# EAGLE board PCB_2D (EAGLE 9.7.0)
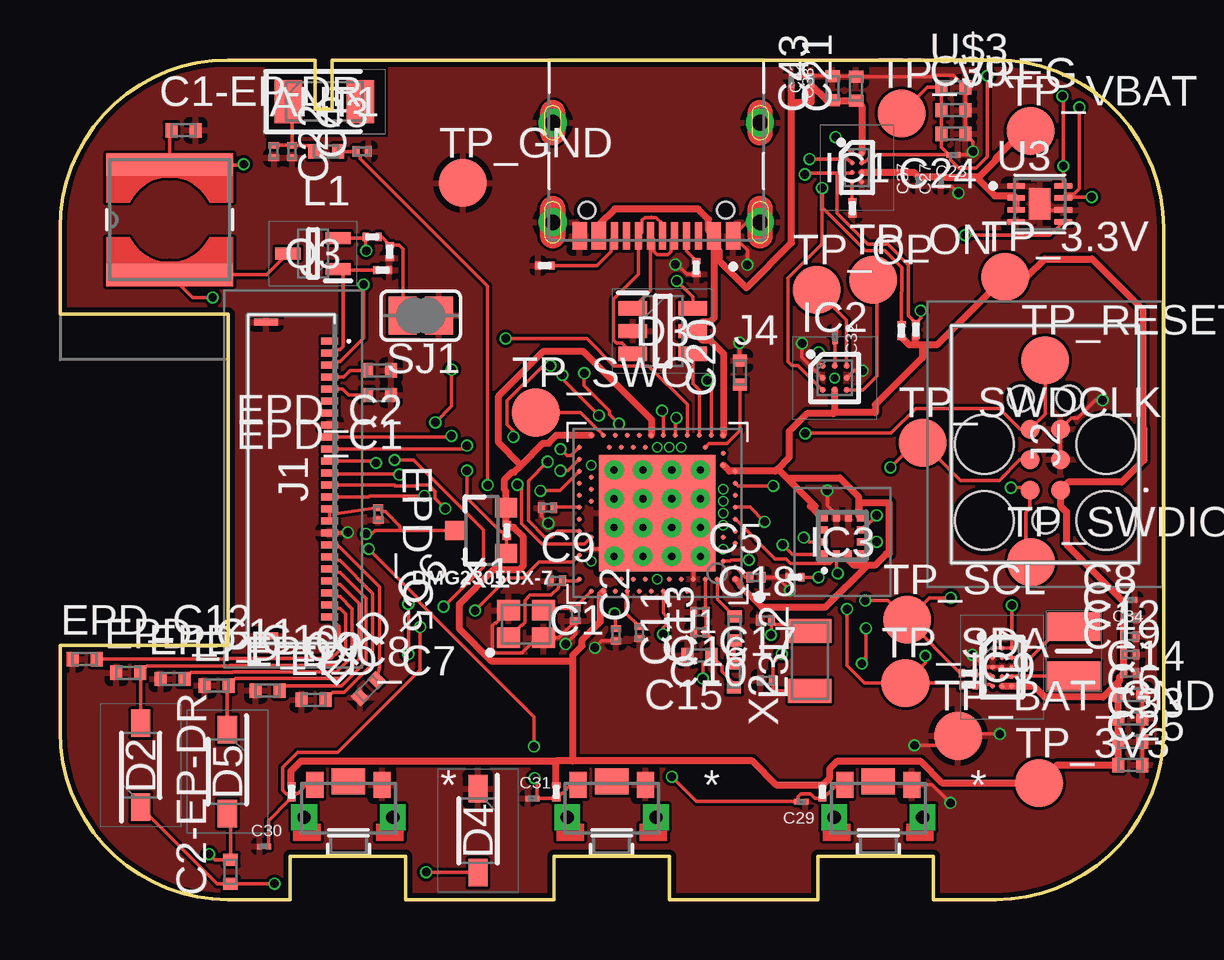
[diagram p0: board, top side]
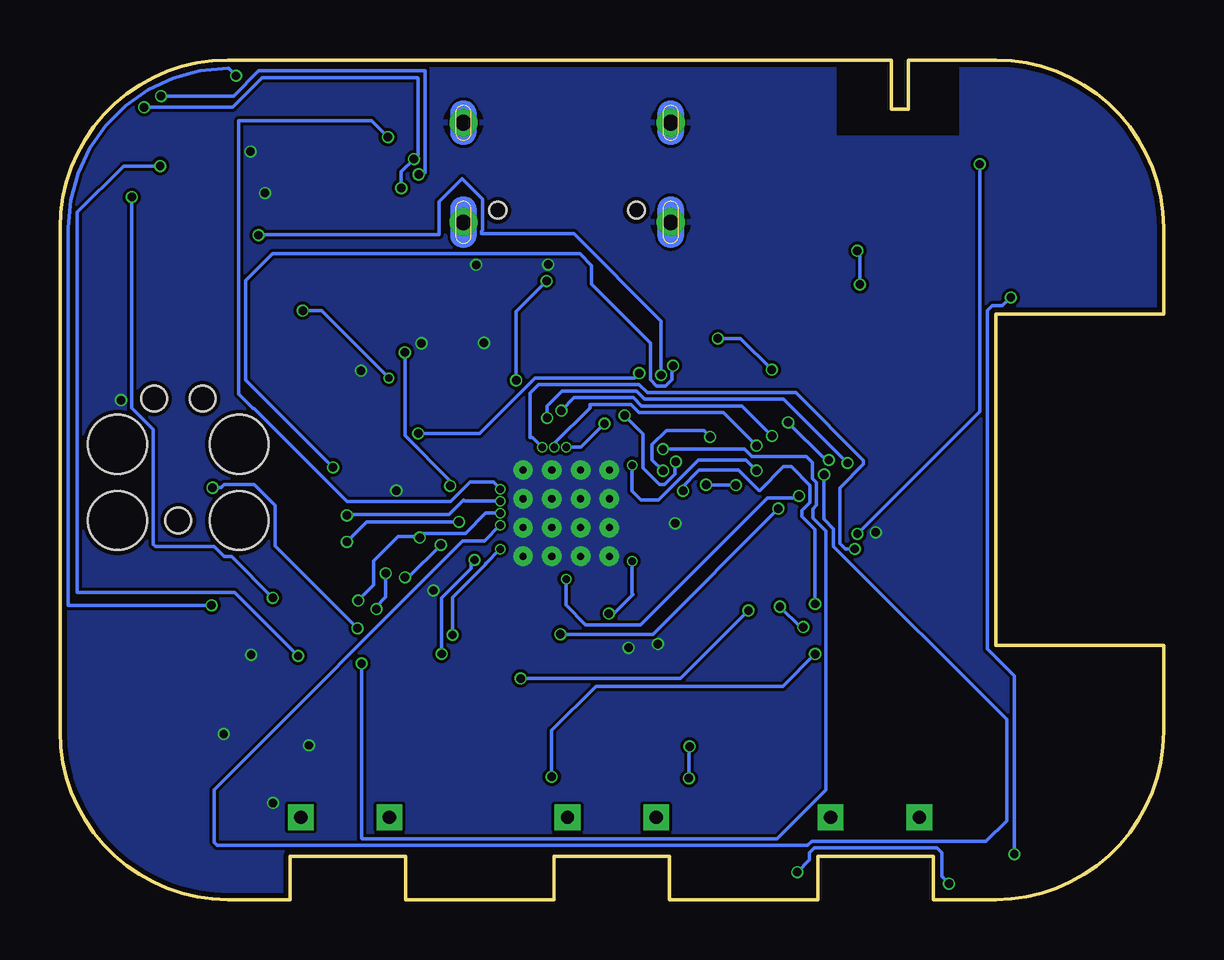
[diagram p1: board, bottom side, seen from below]

Size 46 x 35 mm. Coordinates in mm from the lower left corner, seen from the top.
Outline: 39,0 36.4,0 36.4,1.8 31.6,1.8 31.6,0 25.4,0 25.4,1.8 20.6,1.8 20.6,0 14.4,0 14.4,1.8 9.6,1.8 9.6,0 7,0 arc-90 0,7 0,10.6 7,10.6 7,24.4 0,24.4 0,28 arc-90 7,35 10.64,35 10.64,32.95 11.34,32.95 11.34,35 39,35 arc-90 46,28 46,7 arc-90 39,0
Copper layers (1*16): Top 0.035mm / dielectric 1.6mm / Bottom 0.035mm
Design rules "jlcpcb-2layers.dru": minimum track width 5mil, minimum drill 0.3mm, track to track 5mil, track to pad 5mil, pad to pad 5mil, via to via 5mil, smd to smd 5mil, copper to edge 0.2mm, drill to drill 6mil, minimum pad ring 10mil, minimum via ring 3mil, stop-mask expansion 4mil, vias tented up to drill 0mil, thermal gap 10mil

## Footprints (pad centres in the part's own frame; a part is rotated, then mirrored left to right if it is on the bottom)
2450AT18B100E_ANTC3216X140N = smd 1.15 x 1.8: 1 -1.5,0; 2 1.5,0
NORDIC_NRF_3_RESC0201_L = smd 0.28 x 0.43: 1 -0.255,0; 2 0.255,0
NORDIC_NRF_3_RESC0402_L = smd 0.5 x 0.6: 1 -0.5,0; 2 0.5,0
GRM011R60J152KE01L_2_CAPC0201X13N = smd 0.22 x 0.23: 1 -0.185,0; 2 0.185,0
ESP32_C6_LIBRARY_5_SOD3716X135N = smd 1.15 x 0.8: 1 -1.75,0; 2 1.75,0
ESP32_C6_LIBRARY_3_SOT95P280X145-6N = smd 1.2 x 0.6: 1 -1.25,0.95; 2 -1.25,0; 3 -1.25,-0.95; 4 1.25,-0.95; 5 1.25,0; 6 1.25,0.95
ESP32_C6_LIBRARY_4_ESP32_C6_LIBRARY_4_ESP32_C6_LIBRARY_4_ESP32_C6_LIBRARY_4_ESP32_WROVER_SPARKFUN-DISCRETESEMI_SOT23-3 = smd 0.8 x 0.9: 1 -0.95,-1; 2 0.95,-1; 3 0,1.1
BQ25180YBGR_BGA8C40P2X4_100X155X50 = smd 0.2 x 0.2: A1 -0.2,0.6; A2 0.2,0.6; B1 -0.2,0.2; B2 0.2,0.2; C1 -0.2,-0.2; C2 0.2,-0.2; D1 -0.2,-0.6; D2 0.2,-0.6
DRV2605YZFR_BGA9C50P3X3_144X144X62 = smd 0.25 x 0.25: A1 -0.5,0.5; A2 0,0.5; A3 0.5,0.5; B1 -0.5,0; B2 0,0; B3 0.5,0; C1 -0.5,-0.5; C2 0,-0.5; C3 0.5,-0.5
BMA423_BMA423 = smd 0.3 x 0.35: 1 -0.75,-0.775; 2 -0.25,-0.775; 3 0.25,-0.775; 4 0.75,-0.775; 7 0.75,0.775; 8 0.25,0.775; 9 -0.25,0.775; 10 -0.75,0.775 | smd 0.35 x 0.3: 5 0.775,-0.25; 6 0.775,0.25; 11 -0.775,0.25; 12 -0.775,-0.25
RT6160AWSC_BGA15C40P3X5_140X230X60 = smd 0.216 x 0.216: A1 -0.4,0.8; A2 0,0.8; A3 0.4,0.8; B1 -0.4,0.4; B2 0,0.4; B3 0.4,0.4; C1 -0.4,0; C2 0,0; C3 0.4,0; D1 -0.4,-0.4; D2 0,-0.4; D3 0.4,-0.4; E1 -0.4,-0.8; E2 0,-0.8; E3 0.4,-0.8
503480-2400_5034802400 = smd 0.3 x 0.7: 1 -5.75,1.525; 2 -5.25,1.525; 3 -4.75,1.525; 4 -4.25,1.525; 5 -3.75,1.525; 6 -3.25,1.525; 7 -2.75,1.525; 8 -2.25,1.525; 9 -1.75,1.525; 10 -1.25,1.525; 11 -0.75,1.525; 12 -0.25,1.525; 13 0.25,1.525; 14 0.75,1.525; 15 1.25,1.525; 16 1.75,1.525; 17 2.25,1.525; 18 2.75,1.525; 19 3.25,1.525; 20 3.75,1.525; 21 4.25,1.525; 22 4.75,1.525; 23 5.25,1.525; 24 5.75,1.525 | smd 0.3 x 1: MP1 -6.54,-1.125; MP2 6.54,-1.125
TC2030-IDC_TC2030IDC = smd 0.783 x 0.783: 1 -0.953,-0.635; 2 -0.953,0.635; 3 0.317,-0.635; 4 0.317,0.635; 5 1.588,-0.635; 6 1.588,0.635 | hole 2.451: -2.223,-2.54; -2.223,2.54; 0.952,-2.54; 0.952,2.54 | hole 1.067: -2.223,0; 2.857,-1.016; 2.857,1.016
KH-TYPE-C-16P_KINGHELM_KH-TYPE-C-16P = smd 0.6 x 1.15: A1_B12 -3.2,4.725; A4_B9 -2.4,4.725; A9_B4 2.4,4.725; A12_B1 3.2,4.725 | smd 0.3 x 1.15: A5 -1.25,4.725; A6 -0.25,4.725; A7 0.25,4.725; A8 1.25,4.725; B5 1.75,4.725; B6 0.75,4.725; B7 -0.75,4.725; B8 -1.75,4.725 | drill 0.65 pad 1.05: SH1 -4.32,0; SH2 4.32,0; SH3 -4.32,4.15; SH4 4.32,4.15 | hole 0.7: -2.89,3.65; 2.89,3.65
NORDIC_NRF_2_RESC0402_L = smd 0.5 x 0.6: 1 -0.5,0; 2 0.5,0
ESP32_C6_LIBRARY_2_IND_4828-WE-TPC_WRE = smd 0.9 x 5.3: 1 -2.286,0; 2 2.286,0
MLP2016SR47MT0S1_INDC2016X100N = smd 1.2 x 2.2: 1 -1.028,0; 2 1.028,0
ESP32_C6_LIBRARY_6_SOT65P210X110-3N = smd 1.05 x 0.5: 1 -1.05,0.65; 2 -1.05,-0.65; 3 1.05,0
ERA-1AEB3401C_0201 = smd 0.35 x 0.25: 1 0,0.275; 2 0,-0.275
CPF0201D7K68C1_0201 = smd 0.35 x 0.25: 1 0,0.275; 2 0,-0.275
ESP32_C6_LIBRARY_7_JUMPER_SJ = smd 1.168 x 1.6: 1 -0.762,0; 2 0.762,0
2025-10-22_07-23-44_LIBRARY_SW_EVP-AKE31A_PAN = smd 0.711 x 1.092: 1 -1.4,-0.972; 2 1.4,-0.972 | drill 0.559 pad 0.914 square: 3 -1.848,0.381; 4 1.848,0.381 | smd 1.397 x 1.092: 5 0,-1.124
HECTOR_WATCH_1_TP20R = smd 2 x 2: TP 0,0
NORDIC_NRF_4_AQFN50P700X700X85_HS-74N = smd 4.85 x 4.85: P$74 0,0 | drill 0.3 pad 0.6: P$75 -1.8,1.8; P$76 -0.6,1.8; P$77 0.6,1.8; P$78 1.8,1.8; P$79 -1.8,0.6; P$80 -0.6,0.6; P$81 0.6,0.6; P$82 1.8,0.6; P$83 -1.8,-0.6; P$84 -0.6,-0.6; P$85 0.6,-0.6; P$86 1.8,-0.6; P$87 -1.8,-1.8; P$88 -0.6,-1.8; P$89 0.6,-1.8; P$90 1.8,-1.8 | smd 0.2 x 0.2: P$A8 -1.25,3.25; P$A10 -0.75,3.25; P$A12 -0.25,3.25; P$A14 0.25,3.25; P$A16 0.75,3.25; P$A18 1.25,3.25; P$A20 1.75,3.25; P$A22 2.25,3.25; P$A23 2.75,3.25; P$AA24 3.25,-2.25; P$AB2 -2.75,-2.5; P$AC5 -2,-2.75; P$AC9 -1,-2.75; P$AC11 -0.5,-2.75; P$AC13 0,-2.75; P$AC15 0.5,-2.75; P$AC17 1,-2.75; P$AC19 1.5,-2.75; P$AC21 2,-2.75; P$AC24 3.25,-2.75; P$AD2 -2.75,-3.25; P$AD4 -2.25,-3.25; P$AD6 -1.75,-3.25; P$AD8 -1.25,-3.25; P$AD10 -0.75,-3.25; P$AD12 -0.25,-3.25; P$AD14 0.25,-3.25; P$AD16 0.75,-3.25; P$AD18 1.25,-3.25; P$AD20 1.75,-3.25; P$AD22 2.25,-3.25; P$AD23 2.75,-3.25; P$B1 -3.25,2.75; P$B3 -2.5,2.75; P$B5 -2,2.75; P$B7 -1.5,2.75; P$B9 -1,2.75; P$B11 -0.5,2.75; P$B13 0,2.75; P$B15 0.5,2.75; P$B17 1,2.75; P$B19 1.5,2.75; P$B24 3.25,2.75; P$C1 -3.25,2.25; P$D2 -2.75,2; P$D23 2.75,2; P$E24 3.25,1.75; P$F2 -2.75,1.5; P$F23 2.75,1.5; P$G1 -3.25,1.25; P$H2 -2.75,1; P$H23 2.75,1; P$J1 -3.25,0.75; P$J24 3.25,0.75; P$K2 -2.75,0.5; P$L1 -3.25,0.25; P$L24 3.25,0.25; P$M2 -2.75,0; P$N1 -3.25,-0.25; P$N24 3.25,-0.25; P$P2 -2.75,-0.5; P$P23 2.75,-0.5; P$R1 -3.25,-0.75; P$R24 3.25,-0.75; P$T2 -2.75,-1; P$T23 2.75,-1; P$U1 -3.25,-1.25; P$U24 3.25,-1.25; P$V23 2.75,-1.5; P$W1 -3.25,-1.75; P$W24 3.25,-1.75; P$Y2 -2.75,-2; P$Y23 2.75,-2
ESP32_C6_LIBRARY_SON50P200X200X80-9N = smd 0.76 x 0.27: 1 -0.985,0.75; 2 -0.985,0.25; 3 -0.985,-0.25; 4 -0.985,-0.75; 5 0.985,-0.75; 6 0.985,-0.25; 7 0.985,0.25; 8 0.985,0.75 | smd 0.9 x 1.3: 9 0,0
NORDIC_NRF_BT-XTAL_2016_N = smd 0.95 x 0.85: 1 -0.725,-0.575; 2 0.725,-0.575; 3 0.725,0.575; 4 -0.725,0.575
NORDIC_NRF_1_XTAL_3215_N = smd 1 x 1.8: 1 -1.25,0; 2 1.25,0

## Placement (x,y rotation side)
ANT1  2450AT18B100E  [2450AT18B100E_ANTC3216X140N]  11.02,33.26 0 top
C1  12pF  [NORDIC_NRF_3_RESC0201_L]  20.69,13.29 180 top
C1-EP-DR  10uF  [NORDIC_NRF_3_RESC0402_L]  5.15,32.06 0 top
C2  12pF  [NORDIC_NRF_3_RESC0201_L]  21.48,11.88 270 top
C2-EP-DR  4.7uF/25V  [NORDIC_NRF_3_RESC0402_L]  7.11,1.16 90 top
C3  1pF  [NORDIC_NRF_3_RESC0201_L]  12.6,31.18 0 top
C4  1pF  [NORDIC_NRF_3_RESC0201_L]  9.68,31.18 270 top
C5  100nF  [NORDIC_NRF_3_RESC0201_L]  29.02,13.43 0 top
C6  4.7uF  [NORDIC_NRF_3_RESC0402_L]  44.61,7.56 0 top
C7  100nF  [NORDIC_NRF_3_RESC0201_L]  44.6,10.96 0 top
C8  100nF  [NORDIC_NRF_3_RESC0201_L]  44.61,11.74 0 top
C9  820pF  [NORDIC_NRF_3_RESC0201_L]  20.33,16.33 180 top
C10  N.C.  [NORDIC_NRF_3_RESC0201_L]  26.67,11.15 180 top
C11  100pF  [NORDIC_NRF_3_RESC0201_L]  23.18,11.03 270 top
C12  100nF  [NORDIC_NRF_3_RESC0201_L]  44.6,10.22 0 top
C13  N.C.  [NORDIC_NRF_3_RESC0201_L]  24.16,11.13 270 top
C14  4.7uF  [NORDIC_NRF_3_RESC0402_L]  44.61,8.54 0 top
C15  1.0uF  [NORDIC_NRF_3_RESC0402_L]  26.65,10.18 180 top
C16  47nF  [NORDIC_NRF_3_RESC0201_L]  26.67,11.99 180 top
C17  12pF  [NORDIC_NRF_3_RESC0201_L]  29.44,9.13 0 top
C18  12pF  [NORDIC_NRF_3_RESC0201_L]  29.4,11.64 0 top
C19  100nF  [NORDIC_NRF_3_RESC0201_L]  44.6,9.45 0 top
C20  4.7uF  [NORDIC_NRF_3_RESC0402_L]  28.34,21.96 90 top
C21  4.7uF  [NORDIC_NRF_3_RESC0402_L]  33.19,33.81 90 top
C22  N.C.  [NORDIC_NRF_3_RESC0201_L]  8.92,31.19 270 top
C23  0.1uF  [GRM011R60J152KE01L_2_CAPC0201X13N]  37.24,31.04 180 top
C24  10uF  [NORDIC_NRF_3_RESC0402_L]  37.24,31.92 180 top
C25  22uF  [NORDIC_NRF_3_RESC0402_L]  44.6,5.61 0 top
C27  0.1uF  [GRM011R60J152KE01L_2_CAPC0201X13N]  36.72,29.93 90 top
C29  1uF  [GRM011R60J152KE01L_2_CAPC0201X13N]  30.89,4.09 180 top
C30  1uF  [GRM011R60J152KE01L_2_CAPC0201X13N]  8.5,2.22 0 top
C31  1uF  [GRM011R60J152KE01L_2_CAPC0201X13N]  19.69,4.21 0 top
C32  1uF  [GRM011R60J152KE01L_2_CAPC0201X13N]  32.31,23.46 270 top
C33  22uF  [NORDIC_NRF_3_RESC0402_L]  44.61,6.58 0 top
C34  0.1uF  [GRM011R60J152KE01L_2_CAPC0201X13N]  44.62,12.5 180 top
C37  1uF  [GRM011R60J152KE01L_2_CAPC0201X13N]  35.78,29.94 90 top
C38  1uF  [GRM011R60J152KE01L_2_CAPC0201X13N]  30.49,34.14 270 top
C39  10uF  [NORDIC_NRF_3_RESC0402_L]  37.25,32.91 0 top
C42  0.1uF  [GRM011R60J152KE01L_2_CAPC0201X13N]  31.31,34.15 90 top
C43  4.7uF  [NORDIC_NRF_3_RESC0402_L]  32.2,33.82 90 top
D2  MBR0530  [ESP32_C6_LIBRARY_5_SOD3716X135N]  3.37,5.6 90 top
D3  USBLC6-2SC6Y  [ESP32_C6_LIBRARY_3_SOT95P280X145-6N]  25.13,23.7 0 top
D4  MBR0530  [ESP32_C6_LIBRARY_5_SOD3716X135N]  17.42,2.87 270 top
D5  MBR0530  [ESP32_C6_LIBRARY_5_SOD3716X135N]  6.98,5.33 270 top
DMG2305UX-7  20V/4.2A/52mΩ/1.4W  [ESP32_C6_LIBRARY_4_ESP32_C6_LIBRARY_4_ESP32_C6_LIBRARY_4_ESP32_C6_LIBRARY_4_ESP32_WROVER_SPARKFUN-DISCRETESEMI_SOT23-3]  17.59,15.38 90 top
EPD_C1  1uF/50V  [NORDIC_NRF_3_RESC0402_L]  13.3,21.03 180 top
EPD_C2  1uF/50V  [NORDIC_NRF_3_RESC0402_L]  13.3,22.06 180 top
EPD_C5  0.1uF/50V  [NORDIC_NRF_3_RESC0201_L]  13.26,16.08 270.4 top
EPD_C6  1uF/50V  [NORDIC_NRF_3_RESC0402_L]  12.85,8.79 45.4 top
EPD_C7  1uF/50V  [NORDIC_NRF_3_RESC0402_L]  10.57,8.33 0 top
EPD_C8  1uF/50V  [NORDIC_NRF_3_RESC0402_L]  8.67,8.71 0 top
EPD_C9  1uF/50V  [NORDIC_NRF_3_RESC0402_L]  6.53,8.92 0 top
EPD_C10  1uF/50  [NORDIC_NRF_3_RESC0402_L]  4.7,9.2 0 top
EPD_C11  1uF/50V  [NORDIC_NRF_3_RESC0402_L]  2.85,9.45 0 top
EPD_C12  1uF/50V  [NORDIC_NRF_3_RESC0402_L]  1.03,10.02 0 top
IC1  BQ25180YBGR  [BQ25180YBGR_BGA8C40P2X4_100X155X50]  33.22,30.51 0 top
IC2  DRV2605YZFR  [DRV2605YZFR_BGA9C50P3X3_144X144X62]  32.29,21.74 0 top
IC3  BMA423  [BMA423_BMA423]  32.61,15.16 0 top
IC9  IRT6160AWSC  [RT6160AWSC_BGA15C40P3X5_140X230X60]  39.28,9.69 0 top
J1  503480-2400  [503480-2400_5034802400]  9.72,17.53 270 top
J2  TC2030-IDC  [TC2030-IDC_TC2030IDC]  41.07,18.02 90 top
J4  KH-TYPE-C-16P  [KH-TYPE-C-16P_KINGHELM_KH-TYPE-C-16P]  24.86,32.38 180 top
L1  3.9nH  [NORDIC_NRF_2_RESC0402_L]  11.1,31.19 180 top
L2  10uH  [NORDIC_NRF_2_RESC0402_L]  28.12,11.29 270 top
L3  15nH  [NORDIC_NRF_2_RESC0402_L]  28.09,9.33 270 top
L5  68uH  [ESP32_C6_LIBRARY_2_IND_4828-WE-TPC_WRE]  4.57,28.34 90 top
L7  FTC252012SR47MBCA  [MLP2016SR47MT0S1_INDC2016X100N]  42.27,10.35 270 top
Q3  SI1308EDL-T1-GE3  [ESP32_C6_LIBRARY_6_SOT65P210X110-3N]  10.55,26.93 180 top
R1_EP_DR  0.47  [ERA-1AEB3401C_0201]  13.02,27.63 270 top
R1_USB  5K1  [ERA-1AEB3401C_0201]  26.53,26.34 180 top
R2  0  [ERA-1AEB3401C_0201]  37.89,8.93 90 top
R2_EP_DR  10K  [ERA-1AEB3401C_0201]  13.45,26.24 270 top
R2_USB  5K1  [ERA-1AEB3401C_0201]  20.21,26.43 270 top
R3  0  [CPF0201D7K68C1_0201]  30.63,13.44 90 top
R4  0  [ERA-1AEB3401C_0201]  37.86,9.43 90 top
R5  10K  [ERA-1AEB3401C_0201]  9.66,4.49 180 top
R7  10k  [ERA-1AEB3401C_0201]  31.78,4.49 180 top
R8  10K  [ERA-1AEB3401C_0201]  20.68,4.49 180 top
R9  10K  [ERA-1AEB3401C_0201]  33.03,28.83 180 top
R17  3K3  [CPF0201D7K68C1_0201]  35.08,23.72 180 top
R18  3K3  [CPF0201D7K68C1_0201]  35.68,23.76 180 top
R_PWR_EPD  10K  [ERA-1AEB3401C_0201]  18.62,15.39 180 top
R_TYPE_SEL  2.2  [ERA-1AEB3401C_0201]  13.74,27 180 top
SJ1  [ESP32_C6_LIBRARY_7_JUMPER_SJ]  15.04,24.34 180 top
SW_DN  2025-10-22_07-23-44_LIBRARY_EVP-AKE31ASW_EVP-AKE31A_PAN  [2025-10-22_07-23-44_LIBRARY_SW_EVP-AKE31A_PAN]  34.11,3.81 180 top
SW_ENT  2025-10-22_07-23-44_LIBRARY_EVP-AKE31ASW_EVP-AKE31A_PAN  [2025-10-22_07-23-44_LIBRARY_SW_EVP-AKE31A_PAN]  23,3.81 180 top
SW_UP  2025-10-22_07-23-44_LIBRARY_EVP-AKE31ASW_EVP-AKE31A_PAN  [2025-10-22_07-23-44_LIBRARY_SW_EVP-AKE31A_PAN]  12.02,3.81 180 top
TP_3.3V  HECTOR_WATCH_1_TPTP20R  [HECTOR_WATCH_1_TP20R]  39.4,25.97 0 top
TP_3V3  HECTOR_WATCH_1_TPTP20R  [HECTOR_WATCH_1_TP20R]  40.82,4.85 0 top
TP_BAT_GND  HECTOR_WATCH_1_TPTP20R  [HECTOR_WATCH_1_TP20R]  37.43,6.82 0 top
TP_GND  HECTOR_WATCH_1_TPTP20R  [HECTOR_WATCH_1_TP20R]  16.8,29.87 0 top
TP_ON  HECTOR_WATCH_1_TPTP20R  [HECTOR_WATCH_1_TP20R]  33.9,25.84 0 top
TP_OP  HECTOR_WATCH_1_TPTP20R  [HECTOR_WATCH_1_TP20R]  31.54,25.41 0 top
TP_RESET  HECTOR_WATCH_1_TPTP20R  [HECTOR_WATCH_1_TP20R]  41.07,22.49 0 top
TP_SCL  HECTOR_WATCH_1_TPTP20R  [HECTOR_WATCH_1_TP20R]  35.31,11.66 0 top
TP_SDA  HECTOR_WATCH_1_TPTP20R  [HECTOR_WATCH_1_TP20R]  35.24,9.03 0 top
TP_SWDCLK  HECTOR_WATCH_1_TPTP20R  [HECTOR_WATCH_1_TP20R]  35.95,19.05 0 top
TP_SWDIO  HECTOR_WATCH_1_TPTP20R  [HECTOR_WATCH_1_TP20R]  40.47,14.07 0 top
TP_SWO  HECTOR_WATCH_1_TPTP20R  [HECTOR_WATCH_1_TP20R]  19.84,20.3 0 top
TP_VBAT  HECTOR_WATCH_1_TPTP20R  [HECTOR_WATCH_1_TP20R]  40.46,32.03 0 top
TP_VREG  HECTOR_WATCH_1_TPTP20R  [HECTOR_WATCH_1_TP20R]  35.08,32.78 0 top
U1  NORDIC_NRF_4_NRF52840_QF  [NORDIC_NRF_4_AQFN50P700X700X85_HS-74N]  24.9,16.11 180 top
U3  MAX17048G+T10  [ESP32_C6_LIBRARY_SON50P200X200X80-9N]  40.84,29 0 top
U$3  [NORDIC_NRF_3_RESC0402_L]  37.24,33.86 0 top
X1  32MHz  [NORDIC_NRF_BT-XTAL_2016_N]  19.43,11.49 0 top
X2  32.768kHz  [NORDIC_NRF_1_XTAL_3215_N]  31.25,9.96 90 top

## Library data of the parts
ANT1 = InkTime_v5; ARROW_PART_NUMBER: 2450AT18B100E; ARROW_PRICE-STOCK: https://www.arrow.com/en/products/2450at18b100e/johanson-dielectrics?utm_currency=USD&region=nac; DESCRIPTION: Antennas 2.45GHz ANTENNA; HEIGHT: 1.4mm; MANUFACTURER_NAME: JOHANSON TECHNOLOGY; MANUFACTURER_PART_NUMBER: 2450AT18B100E; MOUSER_PART_NUMBER: 609-2450AT18B100E; MOUSER_PRICE-STOCK: https://www.mouser.co.uk/ProductDetail/Johanson-Technology/2450AT18B100E?qs=yCnrNFeXz%252Bh5MFsFIXGZGA%3D%3D
C1 C1-EP-DR C2 C2-EP-DR C3-C22 C24 C25 C33 C39 C43 EPD_C1 EPD_C2 EPD_C5-EPD_C12 L1-L3 R1_EP_DR R1_USB R2 R2_EP_DR R2_USB R3-R5 R7-R9 R17 R18 R_PWR_EPD R_TYPE_SEL SJ1 TP_3.3V TP_3V3 TP_BAT_GND TP_GND TP_ON TP_OP TP_RESET TP_SCL TP_SDA TP_SWDCLK TP_SWDIO TP_SWO TP_VBAT TP_VREG U1 U$3 X1 X2 = InkTime_v5
C23 C27 C29-C32 C34 C37 C38 C42 = InkTime_v5; AVAILABILITY: In Stock; CHECK_PRICES: https://www.snapeda.com/parts/GRM011R60J152KE01L/Murata/view-part/?ref=eda; DESCRIPTION: SMD Capacitor X5R(EIA) with Capacitance: 1500pF Tol. 10%. Rated Voltage: 6.3Vdc; MF: Murata; MP: GRM011R60J152KE01L; PACKAGE: 0201 Murata; PRICE: None; SNAPEDA_LINK: https://www.snapeda.com/parts/GRM011R60J152KE01L/Murata/view-part/?ref=snap
D2 D4 D5 = InkTime_v5; AVAILABILITY: In Stock; CHECK_PRICES: https://www.snapeda.com/parts/MBR0530/Onsemi/view-part/?ref=eda; DESCRIPTION: Diode Schottky 30 V 500mA Surface Mount SOD-123; MF: ON Semiconductor; MP: MBR0530; PACKAGE: SOD-123-2 ON Semiconductor; PRICE: None; PURCHASE-URL: https://www.snapeda.com/api/url_track_click_mouser/?unipart_id=179458&manufacturer=ON Semiconductor&part_name=MBR0530&search_term=None; SNAPEDA_LINK: https://www.snapeda.com/parts/MBR0530/Onsemi/view-part/?ref=snap
D3 = InkTime_v5; AVAILABILITY: In Stock; CHECK_PRICES: https://www.snapeda.com/parts/USBLC6-2SC6Y/STMicroelectronics/view-part/?ref=eda; DESCRIPTION: 17V Clamp 5A (8/20µs) Ipp Tvs Diode Surface Mount SOT-23-6; MF: STMicroelectronics; MP: USBLC6-2SC6Y; PACKAGE: SOT-23-6 STMicroelectronics; PRICE: None; SNAPEDA_LINK: https://www.snapeda.com/parts/USBLC6-2SC6Y/STMicroelectronics/view-part/?ref=snap
DMG2305UX-7 = InkTime_v5; PROD_ID: TRAN-14388
IC1 = InkTime_v5; ARROW_PART_NUMBER: BQ25180YBGR; ARROW_PRICE-STOCK: https://www.arrow.com/en/products/bq25180ybgr/texas-instruments?utm_currency=USD&region=nac; DESCRIPTION: Charger IC Lithium Ion/Polymer, Lithium Iron Phosphate 8-DSBGA (1.6x1.1); HEIGHT: 0.5mm; MANUFACTURER_NAME: Texas Instruments; MANUFACTURER_PART_NUMBER: BQ25180YBGR; MOUSER_PART_NUMBER: 595-BQ25180YBGR; MOUSER_PRICE-STOCK: https://www.mouser.co.uk/ProductDetail/Texas-Instruments/BQ25180YBGR?qs=doiCPypUmgEWjAK%252BJAX6Tw%3D%3D
IC2 = InkTime_v5; ARROW_PART_NUMBER: DRV2605YZFR; ARROW_PRICE-STOCK: https://www.arrow.com/en/products/drv2605yzfr/texas-instruments?region=nac; DESCRIPTION: Haptic Driver for ERM/LRA with Built-In Library and Smart Loop Architecture; HEIGHT: 0.625mm; MANUFACTURER_NAME: Texas Instruments; MANUFACTURER_PART_NUMBER: DRV2605YZFR
IC3 = InkTime_v5; ARROW_PART_NUMBER: BMA423; ARROW_PRICE-STOCK: https://www.arrow.com/en/products/bma423/bosch; DESCRIPTION: Accelerometers Triaxial low-g 12bit Acceleration Sensor; HEIGHT: 1mm; MANUFACTURER_NAME: BOSCH; MANUFACTURER_PART_NUMBER: BMA423; MOUSER_PART_NUMBER: 262-BMA423; MOUSER_PRICE-STOCK: https://www.mouser.co.uk/ProductDetail/Bosch-Sensortec/BMA423?qs=HXFqYaX1Q2xC%252BSgeGoX3mg%3D%3D
IC9 = InkTime_v5; DESCRIPTION: Buck-Boost Regulator Positive Output Step-Up/Step-Down I2C DC-DC Controller IC 15-WL-CSP (BSC) (1.4x2.3); HEIGHT: 0.6mm; MANUFACTURER_NAME: RICHTEK; MANUFACTURER_PART_NUMBER: RT6160AWSC; MOUSER_PART_NUMBER: 835-RT6160AWSC; MOUSER_PRICE-STOCK: https://www.mouser.co.uk/ProductDetail/Richtek/RT6160AWSC?qs=amGC7iS6iy%2FLd9PSoixZXQ%3D%3D
J1 = InkTime_v5; DESCRIPTION: FFC & FPC Connectors 0.5mm FPC RA SMT Dual Contact 24Ckt; HEIGHT: 1.87mm; MANUFACTURER_NAME: Molex; MANUFACTURER_PART_NUMBER: 503480-2400; MOUSER_PART_NUMBER: 538-503480-2400; MOUSER_PRICE-STOCK: https://www.mouser.co.uk/ProductDetail/Molex/503480-2400?qs=OAhjpuo3Vu7efIoxFh9AOw%3D%3D
J2 = InkTime_v5; DESCRIPTION: CABLE ADAPTER 6 POS; HEIGHT: 19mm; MANUFACTURER_NAME: Tag Connect; MANUFACTURER_PART_NUMBER: TC2030-IDC
J4 = InkTime_v5; AVAILABILITY: Not in stock; CHECK_PRICES: https://www.snapeda.com/parts/KH-TYPE-C-16P/Kinghelm/view-part/?ref=eda; MF: kinghelm; MP: KH-TYPE-C-16P; PACKAGE: None; PRICE: None; SNAPEDA_LINK: https://www.snapeda.com/parts/KH-TYPE-C-16P/Kinghelm/view-part/?ref=snap
L5 = InkTime_v5; COPYRIGHT: Copyright (C) 2024 Ultra Librarian. All rights reserved.; MANUFACTURER_PART_NUMBER: 744043680; MFR_NAME: Wurth Electronics
L7 = InkTime_v5; DESCRIPTION: SMD / SMT Inductors (Coils), L=0.47?H, L x W x T :; HEIGHT: 1mm; JLCPCB: https://jlcpcb.com/partdetail/6763488-FTC252012SR47MBCA/C5832368; MANUFACTURER_NAME: TDK; MANUFACTURER_PART_NUMBER: FTC252012SR47MBCA
Q3 = InkTime_v5; AVAILABILITY: In Stock; CHECK_PRICES: https://www.snapeda.com/parts/SI1308EDL-T1-GE3/Vishay+Siliconix/view-part/?ref=eda; DESCRIPTION: Si1308EDL-T1-GE3 N-channel MOSFET Transistor, 1.5 A, 30 V, 3-Pin SC-70 | Siliconix / Vishay SI1308EDL-T1-GE3; MF: Vishay Siliconix; MP: SI1308EDL-T1-GE3; PACKAGE: SOT-323 Vishay Semiconductor; PRICE: None; PURCHASE-URL: https://www.snapeda.com/api/url_track_click_mouser/?unipart_id=274603&manufacturer=Vishay Siliconix&part_name=SI1308EDL-T1-GE3&search_term=None; SNAPEDA_LINK: https://www.snapeda.com/parts/SI1308EDL-T1-GE3/Vishay+Siliconix/view-part/?ref=snap
SW_DN SW_ENT SW_UP = InkTime_v5; COPYRIGHT: Copyright (C) 2025 Ultra Librarian. All rights reserved.; DIGI-KEY_PART_NUMBER_1: P123437TR-ND; DIGI-KEY_PART_NUMBER_2: P123437CT-ND; DIGI-KEY_PART_NUMBER_3: P123437DKR-ND; MANUFACTURER_NAME: Panasonic; MANUFACTURER_PART_NUMBER: EVP-AKE31A
U3 = InkTime_v5; AVAILABILITY: In Stock; CHECK_PRICES: https://www.snapeda.com/parts/MAX17048G+T10/Analog+Devices/view-part/?ref=eda; DESCRIPTION: 3µA 1-Cell/2-Cell Fuel Gauge with ModelGauge; MF: Analog Devices; MP: MAX17048G+T10; PACKAGE: TDFN-8 Maxim; PRICE: None; PURCHASE-URL: https://www.snapeda.com/api/url_track_click_mouser/?unipart_id=329239&manufacturer=Analog Devices&part_name=MAX17048G+T10&search_term=None; SNAPEDA_LINK: https://www.snapeda.com/parts/MAX17048G+T10/Analog+Devices/view-part/?ref=snap

## Nets
3V3: C6.1 C7.1 C8.1 C12.1 C14.1 C19.1 C25.1 C33.1 C34.2 DMG2305UX-7.2 IC2.C2 IC3.3 IC3.7 IC3.10 IC9.E2 IC9.E3 J2.1 R5.2 R7.2 R8.2 R17.1 R18.1 R_PWR_EPD.2 TP_3.3V.TP TP_3V3.TP U1.P$A22 U1.P$AD14 U1.P$AD23 U1.P$B1 U1.P$W1 U1.P$Y2
ALERT: U1.P$J24 U3.5
D+: D3.4 U1.P$AD6
D-: D3.6 U1.P$AD4
DEC1: C5.1 U1.P$C1
DEC3: C11.1 U1.P$D23
DEC4_6: C10.1 C15.1 C16.1 L3.2 U1.P$B5 U1.P$E24
DN: D3.1 J4.A7 J4.B7
DP: D3.3 J4.A6 J4.B6
EPD_3V3: C1-EP-DR.1 DMG2305UX-7.3 EPD_C5.1 J1.15 J1.16 L5.2
EPD_BUSY: J1.9 U1.P$AD12
EPD_CS: J1.12 U1.P$K2
EPD_DC: J1.11 U1.P$AD10
EPD_RST: J1.10 U1.P$AC11
GDR: J1.2 Q3.1 R2_EP_DR.2
GND: C1-EP-DR.2 C1.2 C2.2 C3.2 C4.2 C5.2 C6.2 C7.2 C8.2 C9.2 C10.2 C11.2 C12.2 C13.2 C14.2 C15.2 C16.2 C17.1 C18.1 C19.2 C20.2 C21.2 C22.2 C23.1 C24.1 C25.2 C27.1 C29.1 C30.1 C31.1 C32.1 C33.2 C34.1 C37.1 C38.1 C39.2 C42.2 C43.2 D3.2 D4.1 EPD_C1.1 EPD_C2.1 EPD_C5.2 EPD_C6.1 EPD_C7.1 EPD_C8.1 EPD_C9.1 EPD_C10.1 EPD_C11.1 EPD_C12.1 IC1.D2 IC2.B1 IC2.B3 IC3.8 IC3.9 IC9.B1 IC9.C1 IC9.C2 IC9.C3 J1.8 J1.17 J1.MP1 J1.MP2 J2.3 J2.5 J4.A1_B12 J4.A12_B1 J4.SH1 J4.SH2 J4.SH3 J4.SH4 R1_USB.1 R2_EP_DR.1 R2_USB.2 R3.1 R9.1 R_TYPE_SEL.1 SJ1.1 SW_DN.1 SW_ENT.1 SW_UP.1 TP_BAT_GND.TP TP_GND.TP U1.P$74 U1.P$75 U1.P$76 U1.P$77 U1.P$78 U1.P$79 U1.P$80 U1.P$81 U1.P$82 U1.P$83 U1.P$84 U1.P$85 U1.P$86 U1.P$87 U1.P$88 U1.P$89 U1.P$90 U1.P$B7 U1.P$F23 U3.1 U3.4 U3.6 U3.9 U$3.2 X1.2 X1.4
HAPTIC_EN: IC2.A1 U1.P$U1
IMU_INT1: IC3.5 U1.P$N1
IMU_INT2: IC3.6 U1.P$P2
LX1: IC9.B2 IC9.B3 L7.1
LX2: IC9.D2 IC9.D3 L7.2
MOSI: J1.14 U1.P$B13
N$1: C32.2 IC2.A2
N$2: C2-EP-DR.2 D5.2 L5.1 Q3.3
N$3: C2.1 U1.P$A23 X1.3
N$4: C1.1 U1.P$B24 X1.1
N$5: L2.2 L3.1
N$6: L2.1 U1.P$B3
N$7: IC3.1 R3.2
N$8: C3.1 L1.1 U1.P$H23
N$9: C2-EP-DR.1 D2.1 D4.2
N$10: C13.1 U1.P$A18
N$11: C9.1 U1.P$N24
N$12: C20.1 U1.P$AC5
N$13: J4.B5 R2_USB.1
N$14: J4.A5 R1_USB.2
N$15: EPD_C2.2 J1.4
N$16: IC9.D1 R4.2
N$17: IC1.D1 R9.2
N$18: EPD_C1.2 J1.5
N$19: IC9.E1 R2.2
N$20: R1_EP_DR.1 R_TYPE_SEL.2 SJ1.2
N$28: EPD_C6.2 J1.18
N$29: EPD_C7.2 J1.19
N$30: EPD_C8.2 J1.20
N$32: EPD_C10.2 J1.22
N$34: EPD_C12.2 J1.24
OUT+: IC2.A3 TP_OP.TP
OUT-: IC2.C3 TP_ON.TP
P0.00/XL1: C17.2 U1.P$D2 X2.1
P0.01/XL2: C18.2 U1.P$F2 X2.2
P0.04: U1.P$J1
P0.09: U1.P$L24
P0.13: C30.2 R5.1 SW_UP.2 U1.P$AD8
P0.14: C31.2 R8.1 SW_ENT.2 U1.P$AC9
P0.19: U1.P$AC15
P0.20: U1.P$AD16
P0.21: U1.P$AC17
P0.22: U1.P$AD18
P0.23: U1.P$AC19
P0.24: U1.P$AD20
P0.25: U1.P$AC21
P0.26: U1.P$G1
P0.27: U1.P$H2
P0.28: U1.P$B11
P0.29: U1.P$A10
P0.30: U1.P$B9
P0.31: U1.P$A8
P1.01: DMG2305UX-7.1 R_PWR_EPD.1 U1.P$Y23
P1.02: C29.2 R7.1 SW_DN.2 U1.P$W24
P1.03: U1.P$V23
P1.04: U1.P$U24
P1.05: U1.P$T23
P1.06: U1.P$R24
P1.07: U1.P$P23
P1.09: U1.P$R1
P1.10: U1.P$A20
P1.11: U1.P$B19
P1.12: U1.P$B17
P1.13: U1.P$A16
P1.14: U1.P$B15
P1.15: U1.P$A14
PMIC_INT: IC1.A1 U1.P$T2
PREVGH: D5.1 EPD_C9.2 J1.21
PREVGL: D2.2 EPD_C11.2 J1.23
RESE: J1.3 Q3.2 R1_EP_DR.2
RESET: J2.6 TP_RESET.TP U1.P$AC13
RF: ANT1.1 C4.1 C22.1 L1.2
SCK: J1.13 U1.P$A12
SCL: IC1.B1 IC2.C1 IC3.12 R4.1 R17.2 TP_SCL.TP U1.P$M2 U3.7
SDA: IC1.C1 IC2.B2 IC3.2 R2.1 R18.2 TP_SDA.TP U1.P$L1 U3.8
SWDCLK: J2.4 TP_SWDCLK.TP U1.P$AA24
SWDIO: J2.2 TP_SWDIO.TP U1.P$AC24
SWO: TP_SWO.TP U1.P$AD22
VBAT: C27.2 C37.2 IC1.C2 TP_VBAT.TP U3.2 U3.3
VBUS: C21.1 C38.2 C42.1 C43.1 D3.5 IC1.A2 J4.A4_B9 J4.A9_B4 U1.P$AD2
VREG: C23.2 C24.2 C39.1 IC1.B2 IC9.A1 IC9.A2 IC9.A3 TP_VREG.TP U$3.1

## Tracks (layer width: path | path; a pad name or v marks a point on that pad's centre or on a via)
3V3
  Top 0.3: C8.1 C7.1 C12.1 C19.1 44.17,9.27 44.17,9.13 44.11,9.07 | C8.1 | C34.2 44.35,12.41 | 44.35,12.41 C8.1 | 44.35,12.41 41.95,14.81 41.95,16.17 41.7,16.41 J2.1 42.03,17.4 44.26,17.4 45.18,18.32 45.18,19.63 45.13,19.68 45.13,24.6 43.02,26.71 41.04,26.71 40.3,25.97 TP_3.3V.TP 36.55,23.12 35.98,23.12 | U1.P$A22 22.53,12.73 22.53,11.59 21.77,10.83 21.77,10.58 21.38,10.19 21.38,9.93 | 32.29,20.32 32.32,20.3 33.99,20.3 33.99,20.63 35.95,22.59 35.95,23.09 35.98,23.12 | IC2.C2 32.29,20.32 | U1.P$Y2 27.9,17.86 U1.P$W1 29.82,17.86 29.92,17.95 | 29.92,17.95 30.3,17.58 | 30.3,17.58 31.47,16.4 31.28,16.4 31.74,15.94 IC3.10 | 33.29,16.23 33.29,16.79 32.5,17.58 30.3,17.58 | 33.29,16.23 33.29,16.01 IC3.7 | 33.29,16.23 33.33,16.18 33.33,16.54 34.57,16.54 34.57,14.41 34.45,14.41 33.97,13.93 33.65,13.93 | R8.2 20.69,5.78 | 20.69,5.78 10.05,5.78 9.63,5.36 9.63,4.79 R5.2 | IC9.E2 IC9.E3 40.61,8.89 41.05,8.44 43.48,8.44 44.11,9.07 | 32.29,20.32 32.23,20.26 31.14,20.26 30.39,19.51 30.39,18.43 29.92,17.95 | 33.65,13.93 31.9,12.19 29.25,12.19 28.34,13.1 28.34,13.16 U1.P$B1 | IC3.3 32.79,14.31 32.79,14.24 33.1,13.93 33.65,13.93 | 21.38,5.78 28.86,5.78 29.87,4.76 R7.2 32.08,5.06 32.08,5.44 32.39,5.75 35.89,5.75 36.79,4.85 TP_3V3.TP 41.57,5.61 C25.1 C33.1 C6.1 C14.1 44.11,9.07 | 21.38,5.78 20.69,5.78 | 21.38,5.78 21.38,9.93 | 35.98,23.12 35.64,23.12 | R18.1 35.64,23.44 35.64,23.12 | R17.1 35.4,23.12 35.64,23.12 | 19.22,18.1 20.14,19.03 20.37,19.03 20.7,19.36 U1.P$AD23 | U1.P$AD14 24.65,20.01 21.8,22.86 20.16,22.86 18.28,20.99 18.28,19.04 19.22,18.1 | 21.38,9.93 18,9.93 16.65,11.28 16.65,12.32 18.08,13.75 19.16,13.75 19.32,13.92 19.32,15.11 18.91,15.52 18.77,15.52 R_PWR_EPD.2 18.59,15.7 DMG2305UX-7.2 18.59,17.02 18.54,17.07 18.54,17.51 18.85,17.82 18.94,17.82 19.22,18.1
ALERT  (via drill 0.35)
  Top 0.15: U1.P$J24 20.74,15.36 20.5,15.11 20.21,15.11 19.52,15.8 19.52,17.44 v20.33,18.25 | v37.72,27.7 41.27,27.7 U3.5 | v22.46,20.18 20.94,21.7 v20.94,21.86
  Bottom 0.15: v20.33,18.25 20.36,18.22 20.36,17.73 20.8,17.3 21.01,17.3 21.69,17.98 21.69,19.4 v22.46,20.18 | v20.94,21.86 20.94,24.12 24.57,27.75 28.44,27.75 28.44,27.87 28.39,27.91 28.39,29.19 29.25,30.04 30.19,29.1 30.19,27.71 v37.72,27.71 v37.72,27.7
D+
  Top 0.15: U1.P$AD6 26.65,21.23 26.38,21.5 D3.4
D-  (via drill 0.35)
  Top 0.15: U1.P$AD4 27.15,21.48 v26.98,21.65 | v25.71,25.79 26.38,25.12 D3.6
  Bottom 0.15: v26.98,21.65 26.98,24.52 v25.71,25.79
DEC1
  Top 0.15: C5.1 28.57,13.43 U1.P$C1
DEC3  (via drill 0.3, 0.35)
  Top 0.15: C11.1 23.16,11.3 23.16,11.88 v23.12,11.92
  Bottom 0.15: v23.12,11.92 v23.12,11.93 22.9,11.93 22.11,12.71 22.15,12.76 U1.P$D23
  other vias: 22.15,14.11
DEC4_6  (via drill 0.35)
  Top 0.15: C15.1 27.15,10.92 C10.1 C16.1 26.9,12.02 U1.P$B5 | C15.1 27.59,9.74 27.59,9.5 28.09,9 L3.2 | U1.P$E24 21.37,14.07 19.98,14.07 19.3,13.4 18.66,13.4 v17.3,12.05 | v26.8,9.21 26.8,9.82 C15.1
  Bottom 0.15: v17.3,12.05 20.14,9.21 v26.8,9.21
DN
  Top 0.15: J4.B7 25.46,27.51 25.46,27 25.35,26.88 24.88,26.88 24.76,27 24.76,27.51 J4.A7 24.61,25.38 D3.1
DP
  Top 0.15: J4.A6 25.11,28.17 24.85,28.44 24.66,28.44 24.65,28.44 24.38,28.44 24.26,28.32 24.26,27.81 J4.B6 24.11,26.07 23.07,25.03 23.07,23.31 23.19,23.2 23.43,23.2 D3.3
EPD_3V3  (via drill 0.35)
  Top 0.15: J1.16 J1.15 11.45,16.07 EPD_C5.1 13.43,16.17 13.57,16.17 14.18,15.55 14.18,15.38 | C1-EP-DR.1 4.57,31.99 L5.2 7.63,30.62 v7.66,30.65 | DMG2305UX-7.3 14.18,15.38 | 14.18,15.38 13.13,15.38 12.99,15.24 v12.76,15.24
  Bottom 0.15: v7.66,30.65 7.66,20.34 v12.76,15.24
EPD_BUSY  (via drill 0.35)
  Top 0.15: J1.9 16.27,19.28 v16.32,19.33 | U1.P$AD12 25.15,20.33 v25.1,20.38
  Bottom 0.15: v25.1,20.38 24.56,20.92 22.09,20.92 21.75,20.58 17.57,20.58 v16.32,19.33
EPD_CS  (via drill 0.3, 0.35)
  Top 0.15: J1.12 11.27,17.75 14.11,17.75 v14.15,17.71
  Bottom 0.15: v14.15,17.71 14.16,17.69 14.16,15.86 13.77,15.46 13.77,14.73 6.54,7.5 6.54,3.29 7.4,2.43 14.66,2.43 14.84,2.25 39.45,2.25 39.58,2.38 39.58,4.58 29.21,14.94 28.31,14.94 U1.P$K2
  other vias: 27.65,15.61
EPD_DC  (via drill 0.35)
  Top 0.15: J1.11 13.09,18.28 v13.17,18.2 | U1.P$AD10 25.65,19.85 25.7,19.89 v25.7,20.08
  Bottom 0.15: v13.17,18.2 v13.18,18.2 15.83,20.86 21.64,20.86 21.97,21.2 25.07,21.2 25.7,20.57 v25.7,20.08
EPD_RST  (via drill 0.3, 0.35)
  Top 0.15: J1.10 16.82,18.78 v16.96,18.92
  Bottom 0.15: v16.96,18.92 18.34,20.3 21.86,20.3 22.2,20.64 23.91,20.64 23.91,20.49 25.4,19 U1.P$AC11
  other vias: 25.4,18.86
GDR
  Top 0.15: 11.8,26.24 R2_EP_DR.2 | Q3.1 11.8,26.29 11.8,26.24 | J1.2 11.39,22.93 11.68,22.93 11.8,23.05 11.8,26.24
GND  (via drill 0.35)
  Top 0.15: C34.1 44.86,12.44 | 44.86,10.97 C7.2 | C12.2 | C19.2 45.11,9.2 C14.2 C6.2 C33.2 C25.2 | J4.SH3 28.64,28.23 J4.A1_B12 28.65,27.07 v28.65,26.46 | J2.3 J2.5 42.16,20.07 42.42,20.07 43.16,20.81 v43.46,20.81 | C38.1 31.3,34.33 C42.2 32.18,34.34 C43.2 C21.2 36.35,34.31 36.4,34.36 37.23,34.36 U$3.2 37.74,32.92 C39.2 C24.1 38.05,31.6 v38.05,31.18 37.92,31.04 C23.1 | X1.4 18.18,11.54 18.14,11.54 18.02,11.42 18.02,10.4 18.14,10.29 19.26,10.29 19.89,10.91 X1.2 20.77,10.91 C2.2 21.48,11.06 v21.08,10.65 | R1_USB.1 26.14,26.06 25.73,26.47 v25.65,26.47 | C20.2 28.33,22.47 v28.33,23.21 | 31.35,22.18 IC2.B1 | 31.35,22.18 31.33,22.18 | 31.35,22.18 30.93,22.6 v30.93,23.19 | C11.2 22.58,10.78 v22.3,10.49 | IC3.9 32.21,16.09 32.21,16.2 31.98,16.43 v31.98,17.04 | C9.2 20.08,15.96 v20.35,15.68 | U1.P$F23 22.8,14.61 U1.P$78 | U1.P$B7 26.4,14.01 U1.P$75 | C27.1 37.16,29.75 v37.45,29.46 | R3.1 30.35,13.43 | C5.2 29.89,13.43 v30.43,12.89 | IC9.C2 IC9.C1 38.54,9.69 v38.03,10.2 | IC2.B3 33.1,22.05 v33.45,22.05 | v39.18,6.9 37.51,6.9 TP_BAT_GND.TP 37.04,6.43 v35.62,6.43 | SW_DN.1 36.37,4.78 v37.12,4.02 | J1.17 11.97,15.28 v12,15.31 | U3.6 41.09,28.75 U3.9 | U1.P$85 U1.P$74
  pour Top: 8.62,31.72 8.59,31.68 8.56,31.67 8.53,31.67 8.5,31.68 8.48,31.7 8.47,31.73 8.47,36.89 8.39,36.97 8.39,36.96 8.39,36.96 8.38,36.95 8.37,36.94 8.37,36.94 8.37,36.94 8.35,36.94 8.34,36.93 8.34,36.93 8.34,36.93 8.33,36.93 8.31,36.93 8.31,36.93 8.31,36.93 8.3,36.93 8.28,36.94 8.28,36.94 8.28,36.94 8.27,36.95 8.26,36.96 8.26,36.96 8.22,37 -4.8,37 -4.82,36.98 -4.82,-5.36 -3.58,-4.12 -3.55,-4.11 49.45,-4.11 49.79,-3.77 49.79,36.08 49.53,36.34 13.74,36.34 13.74,36.33 13.74,31.78 13.73,31.76 13.71,31.73 13.68,31.72
  pour Bottom: 8.44,31.86 8.44,36.87 -4.71,36.87 -4.74,36.88 -4.85,36.99 -4.85,-5.4 -3.58,-4.13 -3.55,-4.12 49.44,-4.12 49.79,-3.76 49.79,36.08 49.51,36.36 13.7,36.36 13.7,31.85 13.69,31.82 13.66,31.8 13.64,31.79 8.52,31.79 8.49,31.8 8.45,31.83
HAPTIC_EN  (via drill 0.35)
  Top 0.15: IC2.A1 31.63,22.41 v31.63,22.81 | U1.P$U1 28.26,17.25 v29.74,17.25
  Bottom 0.15: v31.63,22.81 31.63,19.33 29.74,17.45 v29.74,17.25
IMU_INT1  (via drill 0.35)
  Top 0.15: U1.P$N1 28.76,16.36 v29.37,15.74 | v34.04,14.91 IC3.5
  Bottom 0.15: v29.37,15.74 33.21,15.74 v34.04,14.91
IMU_INT2  (via drill 0.3, 0.35)
  Top 0.15: 33.41,15.41 IC3.6 33.53,15.56 33.59,15.56 34.04,16.01 v34.04,16.02
  Bottom 0.15: v34.04,16.02 33.99,16.06 29.77,16.06 29.17,16.66 29.12,16.61 U1.P$P2
  other vias: 27.65,16.61
LX1
  Top 0.15: L7.1 41.75,11.38 40.47,10.09 IC9.B3 IC9.B2
LX2
  Top 0.15: L7.2 39.71,9.32 IC9.D3 IC9.D2
MOSI  (via drill 0.3, 0.35)
  Top 0.15: J1.14 12.86,16.78 12.91,16.83 v15.19,16.83
  Bottom 0.15: v15.19,16.83 15.27,16.75 16.5,16.75 21.79,11.46 24.08,11.46 24.9,12.27 U1.P$B13
  other vias: 24.9,13.36
N$1
  Top 0.15: C32.2 32.3,22.26 IC2.A2
N$2  (via drill 0.35)
  Top 0.15: Q3.3 8.62,26.05 L5.1 5.53,25.1 v6.36,25.1 | D5.2 7.11,3.45 C2-EP-DR.2 6.44,1.66 v6.22,1.89
  Bottom 0.15: v6.36,25.1 6.71,24.75 7.15,24.75 7.35,24.54 7.35,10.46 6.22,9.32 v6.22,1.89
N$3
  Top 0.15: X1.3 20.22,12.13 C2.1 21.48,12.19 U1.P$A23
N$4
  Top 0.15: U1.P$B24 21.58,13.29 C1.1 20.78,13.12 20.78,12.99 20.48,12.69 19.59,12.69 19.38,12.47 19.38,11.55 19.26,11.43 19.22,11.43 X1.1
N$5
  Top 0.15: L3.1 28.09,10.77 L2.2
N$6
  Top 0.15: L2.1 27.4,12.52 U1.P$B3
N$7  (via drill 0.35)
  Top 0.15: IC3.1 30.53,14.39 v30.12,14.79 | v31.62,13.43 R3.2
  Bottom 0.15: v30.12,14.79 31.48,13.43 v31.62,13.43
N$8  (via drill 0.35)
  Top 0.15: v17.83,17.27 17.83,25.57 12.51,30.89 12.51,31.02 C3.1 L1.1 | U1.P$H23 21.87,14.83 20.1,14.83 19.25,15.68 19.25,17.12 v19.07,17.29
  Bottom 0.15: v17.83,17.27 19.05,17.27 v19.07,17.29
N$9  (via drill 0.35)
  Top 0.15: D2.1 6.55,0.66 C2-EP-DR.1 v8.94,0.66 | v15.27,1.14 17.41,1.14 D4.2
  Bottom 0.15: v8.94,0.66 9.25,0.97 9.25,1.95 9.45,2.15 14.55,2.15 14.75,1.95 14.75,1.65 v15.27,1.14
N$10
  Top 0.15: U1.P$A18 23.65,12.47 23.6,12.43 23.6,11.93 C13.1
N$11
  Top 0.15: C9.1 20.61,16.36 U1.P$N24
N$12
  Top 0.15: U1.P$AC5 27.05,19 27.79,19 28.34,19.55 C20.1
N$13
  Top 0.15: J4.B5 22.96,27.51 22.96,27 22.39,26.43 R2_USB.1
N$14
  Top 0.15: R1_USB.2 26.11,27.03 J4.A5
N$15
  Top 0.15: EPD_C2.2 12.09,22.06 11.82,21.78 J1.4
N$16
  Top 0.15: IC9.D1 38.79,9.38 38.19,9.38 R4.2
N$17
  Top 0.15: R9.2 33.02,29.12 IC1.D1
N$18
  Top 0.15: EPD_C1.2 12.03,21.03 11.78,21.28 J1.5
N$19
  Top 0.15: IC9.E1 38.79,8.98 38.21,8.98 R2.2
N$20
  Top 0.15: R_TYPE_SEL.2 13.82,27.28 | R1_EP_DR.1 13.4,27.63 R_TYPE_SEL.2 | R_TYPE_SEL.2 14.13,27.28 14.3,27.11 14.3,24.37 SJ1.2
N$28
  Top 0.15: EPD_C6.2 13.31,9.7 13.32,9.7 13.32,13.03 11.56,14.78 J1.18
N$29
  Top 0.15: J1.19 11.39,14.13 11.68,14.13 13.04,12.77 13.04,9.82 11.85,8.63 11.37,8.63 EPD_C7.2
N$30
  Top 0.15: J1.20 11.39,13.63 11.68,13.63 12.76,12.54 12.76,9.93 11.74,8.91 9.36,8.91 EPD_C8.2
N$32
  Top 0.15: EPD_C10.2 5.46,9.47 7.19,9.47 7.21,9.49 11.54,9.49 12.18,10.14 12.18,12.12 11.68,12.63 11.39,12.63 J1.22
N$34
  Top 0.15: J1.24 11.63,11.39 11.63,10.37 11.31,10.05 6.98,10.05 6.96,10.02 EPD_C12.2
OUT+
  Top 0.15: TP_OP.TP 32.79,24.16 IC2.A3
OUT-
  Top 0.15: IC2.C3 33.47,21.24 34.05,21.83 34.05,25.68 TP_ON.TP
P0.00/XL1  (via drill 0.35)
  Top 0.15: C17.2 29.72,9.14 | X2.1 29.72,8.71 29.72,9.14 | U1.P$D2 27.93,14.11 27.98,14.16 28.27,14.16 28.28,14.16 v28.72,14.16 | v30.09,10.24 29.72,9.87 29.72,9.14
  Bottom 0.15: v28.72,14.16 28.86,14.01 28.86,13.8 30.09,12.57 v30.09,10.24
P0.01/XL2  (via drill 0.3, 0.35)
  Top 0.15: X2.2 30.99,11.48 29.82,11.48 C18.2 29.66,11.05 v29.64,11.03
  Bottom 0.15: 28.27,13.99 28.27,14.02 | v29.64,11.03 29.64,12.6 28.27,13.97 28.27,13.99 | U1.P$F2 28.27,13.99
  other vias: 27.65,14.61
P0.13  (via drill 0.35)
  Top 0.15: 9.88,4.43 9.92,4.43 10.26,4.78 SW_UP.2 | C30.2 8.69,3.29 9.56,4.16 9.61,4.16 R5.1 9.81,4.36 9.88,4.43 | U1.P$AD8 26.15,20.64 24.54,22.25 23.19,22.25 23.1,22.25 21.97,23.38 21.97,23.39 v18.58,23.39 | v16.33,22.09 16.33,20.57 v15.65,19.89 | v13.95,18.32 14.74,18.32 17.65,15.41 17.65,13.87 v15.99,12.21 | v15.02,11.36 15.02,9.57 11.58,6.13 9.9,6.13 9.28,5.51 9.28,4.55 9.42,4.41 9.8,4.41 9.83,4.43 9.88,4.43
  Bottom 0.15: v18.58,23.39 17.64,23.39 v16.33,22.09 | v15.65,19.89 14.08,18.32 v13.95,18.32 | v15.99,12.21 15.14,11.36 v15.02,11.36
P0.14  (via drill 0.3, 0.35)
  Top 0.15: SW_ENT.2 21.29,4.78 20.94,4.43 20.91,4.43 R8.1 C31.2 19.88,4.96 v19.79,5.06 | v19.76,6.38 19.76,7.62 14.98,12.4 14.98,12.51 v12.87,14.61 | v12.87,14.61
  Bottom 0.15: v19.76,6.38 19.79,6.35 v19.79,5.06 | v12.87,14.61 13.26,14.61 13.49,14.84 13.49,17.16 12.5,18.15 12.5,18.31 15.32,21.13 21.52,21.13 21.86,21.47 26.05,21.47 26.41,21.11 26.41,19.27 26.31,19.27 U1.P$AC9
  other vias: 25.9,18.86
P1.01  (via drill 0.3, 0.35)
  Top 0.15: DMG2305UX-7.1 18.62,14.46 R_PWR_EPD.1 18.4,15.34 18.36,15.34 16.96,16.74 v16.96,17.88
  Bottom 0.15: v16.96,17.88 17.41,18.32 19.38,18.32 21.05,16.65 21.78,16.65 22.15,17.02 U1.P$Y23
  other vias: 22.15,18.11
P1.02  (via drill 0.35)
  Top 0.15: SW_DN.2 32.38,4.78 32.04,4.43 32,4.43 R7.1 31.46,4.21 31.27,4.4 30.89,4.4 30.77,4.29 30.77,4.14 C29.2 26.54,4.09 v25.5,5.12 | v14.52,10.23 v14.52,12.32 | U1.P$W24 20.85,17.06 20.05,17.06 v20.03,17.03
  Bottom 0.15: v25.5,5.12 25.5,7.05 23.66,8.89 15.86,8.89 v14.52,10.23 | v14.52,12.32 14.52,15.43 15.07,15.98 15.07,16.23 14.74,16.56 14.74,17.27 15.51,18.04 15.85,18.04 16.83,17.06 16.86,17.06 17.71,17.9 19.36,17.9 20.1,17.16 20.05,17.12 20.05,17.06 v20.03,17.03
PMIC_INT  (via drill 0.3, 0.35)
  Top 0.15: IC1.A1 32.35,31.78 v32.33,31.78
  Bottom 0.15: v32.33,31.78 33.02,32.47 38.55,32.47 38.55,21.08 37.95,20.48 37.9,20.48 34.02,16.59 29.71,16.59 28.91,17.4 27.94,17.4 U1.P$T2
  other vias: 27.65,17.11
PREVGH
  Top 0.15: J1.21 11.39,13.13 11.68,13.13 12.46,12.34 12.46,10.03 11.65,9.21 7.32,9.21 EPD_C9.2 6.98,8.87 D5.1
PREVGL
  Top 0.15: J1.23 11.39,12.13 11.68,12.13 11.91,11.9 11.91,10.26 11.42,9.77 7.09,9.77 7.07,9.75 3.64,9.75 EPD_C11.2 3.37,9.44 D2.2
RESE  (via drill 0.35)
  Top 0.15: Q3.2 12.74,27.58 | 12.74,27.58 12.79,27.58 R1_EP_DR.2 | J1.3 11.39,22.43 11.68,22.43 12.66,23.41 v12.66,25.64 | v12.77,27.05 12.74,27.07 12.74,27.58
  Bottom 0.15: v12.66,25.64 12.66,26.94 v12.77,27.05
RESET  (via drill 0.3, 0.35)
  Top 0.15: TP_RESET.TP 41.07,20.25 J2.6 40.01,19.61 39.15,20.48 35.68,20.48 34.65,19.44 v31.07,19.44 v31.07,19.43 | v23.3,19.84 22.92,20.22 22.92,20.37 21.85,21.43 v21.85,21.95
  Bottom 0.15: v23.3,19.84 24.28,18.86 U1.P$AC13 | v31.07,19.43 28.52,19.43 26.2,21.75 22.05,21.75 v21.85,21.95
  other vias: 24.9,18.86
RF
  Top 0.15: ANT1.1 9.68,33.1 C4.1 | C4.1 C22.1 | C4.1 10.35,31.44 L1.2
SCK  (via drill 0.35)
  Top 0.15: J1.13 13.94,17.28 13.98,17.24 14.88,17.24 14.92,17.28 15.38,17.28 15.64,17.02 15.64,16.71 v16.06,16.3 | v25.14,11.06 25.14,11.32 25.27,11.45 25.27,11.83 25.15,11.95 U1.P$A12
  Bottom 0.15: v16.06,16.3 21.29,11.06 v25.14,11.06
SCL  (via drill 0.3, 0.35)
  Top 0.15: TP_SCL.TP 37.54,9.43 R4.1 | U3.7 41.92,29.35 | 41.92,29.35 41.99,29.41 42.27,29.41 42.49,29.64 v42.49,33.03 | v31.24,30.87 32.84,30.87 32.89,30.81 32.92,30.81 IC1.B1 | R17.2 35.08,25.32 35.1,25.34 35.1,26.34 34.39,27.04 33.57,27.04 31.77,28.84 | 31.77,28.84 v31.77,29.67 | 31.77,28.84 31.75,28.82 31.75,27.32 30.34,25.91 30.34,24.91 30.34,22.43 30.5,22.27 30.77,22.27 IC2.C1 | TP_SCL.TP 34.51,12.46 v33.57,12.46 | IC3.12 31.23,14.91 31.06,15.09 v31.01,15.09 | TP_SCL.TP 36.24,12.58 v37.13,12.58 | v43,29.29 41.99,29.29 41.92,29.35
  Bottom 0.15: v42.49,33.03 38.79,33.03 37.57,34.25 31.09,34.25 31.07,34.23 31.07,31.04 v31.24,30.87 31.77,30.34 v31.77,29.67 | v33.57,12.46 32.93,13.11 32.93,14.11 31.9,15.13 31.01,15.13 | v37.13,12.58 38.84,14.3 39.15,14.3 39.57,14.72 42.02,14.72 42.11,14.81 42.11,19.6 43,20.5 v43,29.29 | 31.01,15.13 | 31.01,15.13 v31.01,15.09 | 31.01,15.13 30.88,15.26 29.1,15.26 28.25,16.11 U1.P$M2
  other vias: 27.65,16.11
SDA  (via drill 0.3, 0.35)
  Top 0.15: TP_SDA.TP 37.52,9.03 R2.1 | U3.8 v41.82,30.58 41.82,33.46 v41.78,33.49 | IC1.C1 32.99,30.29 32.39,30.29 | 32.39,30.29 31.1,30.29 v31.04,30.23 | 32.39,30.29 32.39,28.61 33.68,27.32 34.51,27.32 35.38,26.45 35.38,24.34 R18.2 35.88,24.24 v35.88,24.55 | v32.42,13.6 32.36,13.66 IC3.2 32.21,14.24 32.21,14.13 32.09,14.01 30.44,14.01 30.25,14.2 29.81,14.2 U1.P$L1 | TP_SDA.TP 36.07,9.86 v36.07,10.15 | TP_SDA.TP 33.53,9.03 32.81,9.75 v32.81,12.11
  Bottom 0.15: v41.78,33.49 38.77,33.49 37.71,34.55 30.78,34.55 30.78,30.31 30.8,30.29 30.99,30.29 v31.04,30.23 | v35.88,24.55 35.1,24.55 IC2.B2 | v32.42,13.6 32.42,12.61 32.81,12.23 v32.81,12.11 | v36.07,10.15 38.73,12.81 45.27,12.81 45.27,28.65 43.35,30.58 v41.82,30.58
  other vias: 32.29,21.74
SWDCLK  (via drill 0.35)
  Top 0.15: J2.4 40.01,18.34 39.15,17.47 37.53,17.47 TP_SWDCLK.TP 35.65,19.05 v34.62,18.02 | v18.9,19.29 18.9,19.54 18.63,19.8 18.63,20.8 19.34,21.5 19.4,21.5 20.23,22.34 20.36,22.34 v20.44,22.25 | U1.P$AA24 21.17,17.88 v20.86,17.88 | v20.44,22.25
  Bottom 0.15: v18.9,19.29 | v18.9,19.29 19.16,19.55 20.73,19.55 21.32,18.96 21.32,18.33 v20.86,17.88 | v34.62,18.02 38.25,21.65 38.25,25.81 37.13,26.92 24.32,26.92 23.83,26.44 23.83,25.65 21.39,23.21 21.39,21.68 21.13,21.41 20.75,21.41 20.49,21.68 20.49,22.21 v20.44,22.25
SWDIO  (via drill 0.35)
  Top 0.15: TP_SWDIO.TP 40.26,14.28 40.26,16.13 40.43,16.31 J2.2 40.33,17.17 v39.64,17.17 | v33.6,11.31 33.6,10.01 v33.43,9.84 | U1.P$AC24 21.3,18.51 21.13,18.51 v20.86,18.78
  Bottom 0.15: v39.64,17.17 39.28,17.17 39.15,17.3 37.9,17.3 37.03,16.42 37.03,14.73 v33.6,11.31 | v33.43,9.84 33.43,2.56 33.4,2.53 16.12,2.53 14.07,4.58 14.07,15.37 14.62,15.91 14.62,16.29 14.46,16.45 14.46,17.38 14.63,17.56 14.63,18.22 14.88,18.46 17.15,18.46 17.47,18.78 v20.86,18.78
SWO
  Top 0.15: U1.P$AD22 22.28,19.73 21.7,20.3 TP_SWO.TP
VBAT
  Top 0.3: U3.3 U3.2 39.77,29.34 38.96,29.34 38.17,30.13 37.82,30.13 | TP_VBAT.TP 40.3,32.2 39.02,30.92 39.02,30.83 38.33,30.14 37.83,30.14 37.82,30.13 | IC1.C2 35.6,30.31 C37.2 36.7,30.13 C27.2 37.8,30.11 37.82,30.13
VBUS
  Top 0.3: IC1.A2 33.42,33.08 C21.1 C43.1 31.96,33.32 C42.1 31.31,33.24 | J4.A9_B4 22.46,28.13 23.13,28.79 26.6,28.79 27.04,28.35 27.04,27.88 J4.A4_B9 27.26,27.26 | 27.26,27.26 27.26,24.24 27.09,24.07 26.75,24.07 D3.5 26.75,23.32 27.09,23.32 27.65,22.77 U1.P$AD2 | 30.49,33.23 30.49,27.38 28.61,25.5 27.48,26.62 27.48,27.04 27.26,27.26 | 30.49,33.23 C38.2 | 31.31,33.24 31.3,33.23 | 30.49,33.23 30.51,33.24 31.31,33.24
VREG  (via drill 0.35)
  Top 0.15: U$3.1 C39.1 C24.2 36.74,31.36 C23.2 | IC1.B2 33.47,30.76 33.57,30.76 33.85,31.04 C23.2 | 36.9,33.86 U$3.1 | TP_VREG.TP 36.16,33.86 U$3.1 | C23.2 37.11,30.99 37.11,30.85 37.47,30.49 38.18,30.49 38.66,30.98 v38.66,34.35 | v39.68,12.27 IC9.A3 IC9.A2 IC9.A1
  Bottom 0.15: v38.66,34.35 38.97,34.65 39,34.65 40.15,34.55 40.46,34.47 41.27,34.25 42.32,33.76 43.27,33.1 44.1,32.27 | 44.1,32.27 | 44.1,32.27 44.76,31.32 45.25,30.27 45.55,29.15 45.65,28 45.65,12.27 v39.68,12.27